# Altium PCB ATK_BC28_02.PcbDoc
Units mil, origin at the board's own origin, x right, y up, seen from the top; angles counter-clockwise.
Board outline 826 x 1653 mil, 2 copper layers (Top Layer, Bottom Layer); 36 components, 30 nets, 140 pads, 99 vias.
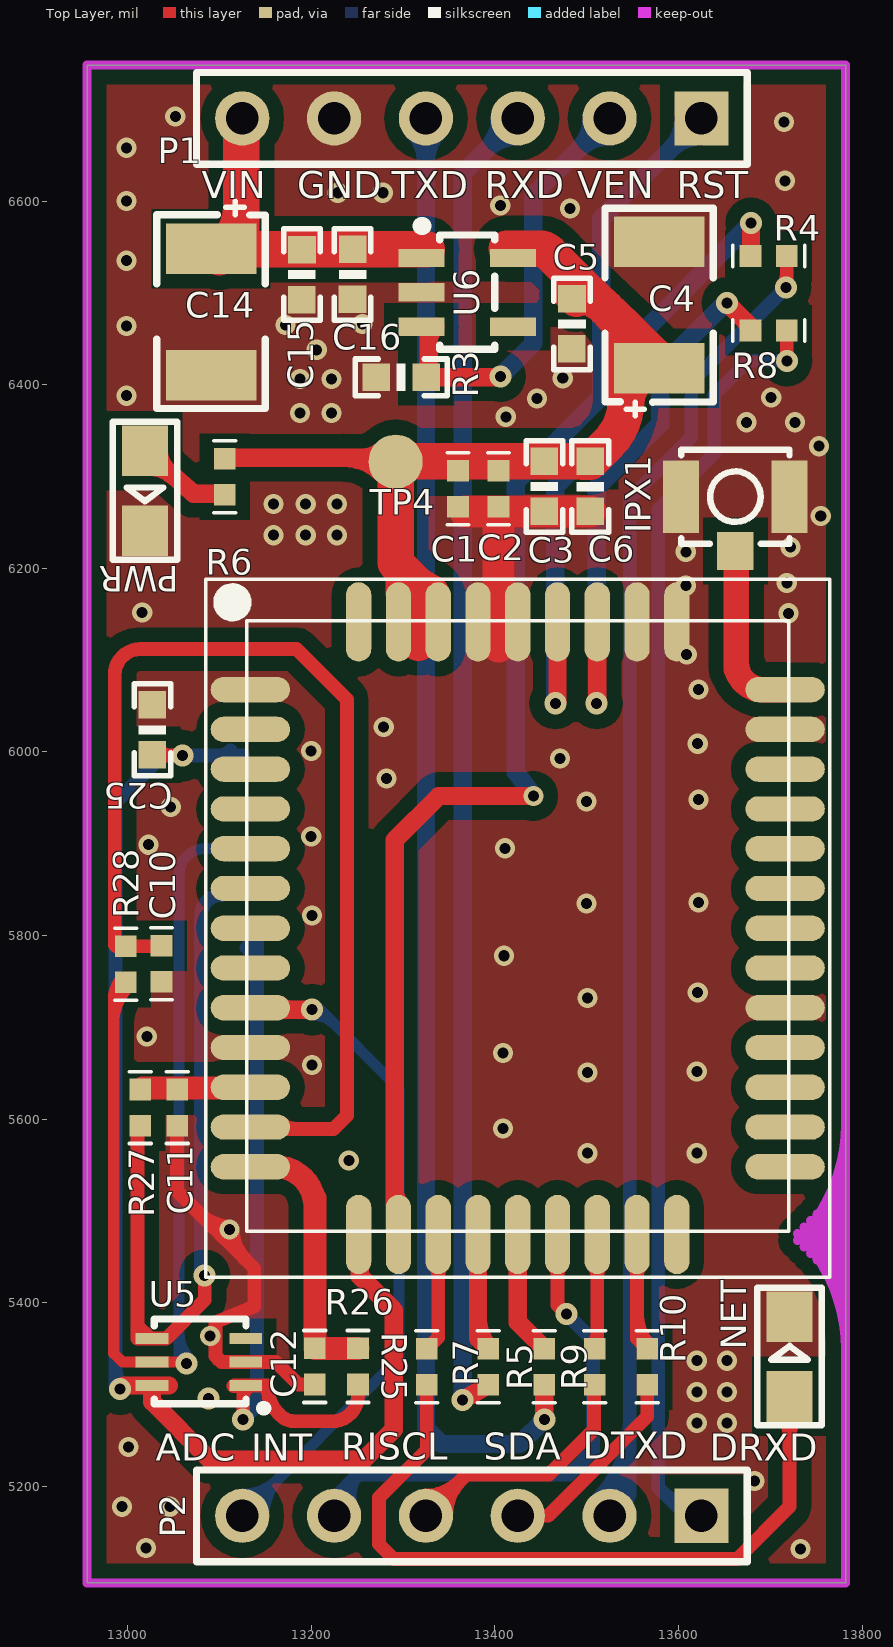
[diagram p0: Top Layer view]
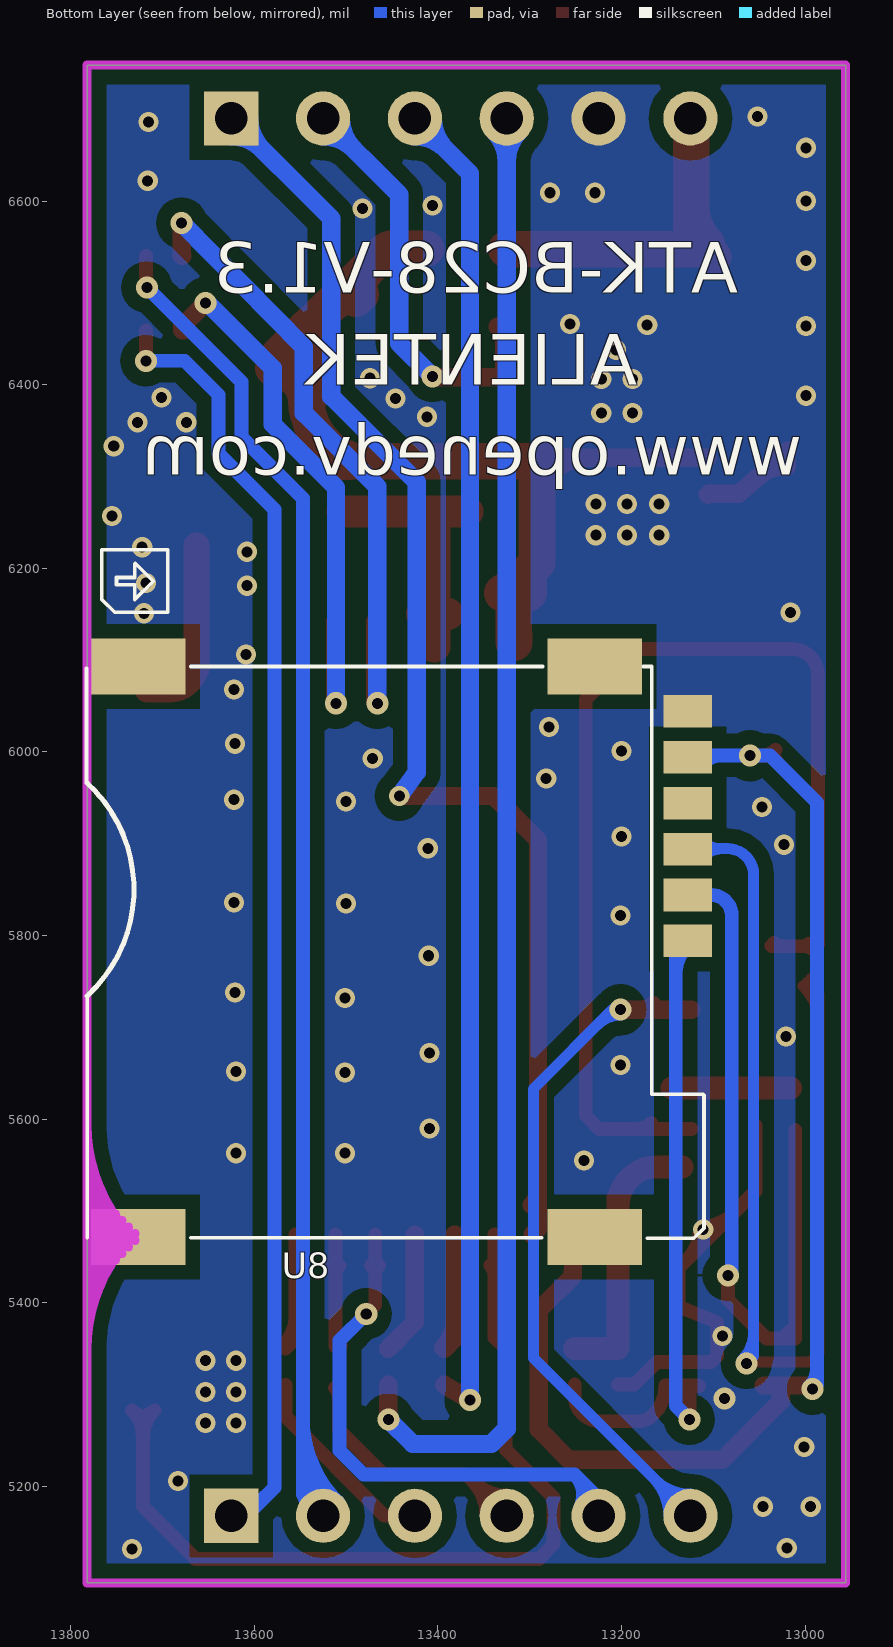
[diagram p1: Bottom Layer view, seen from below]

## Layer stack, top to bottom
Top Layer: signal copper 1.4
Dielectric: dielectric 12.6, FR-4, Dk 4.8
Bottom Layer: signal copper 1.4

## Board outline
12956,6748 13782,6748 13782,5095 12956,5095

## Design rules (kind name [scope] priority, off if disabled: settings)
Clearance [All] p1: gap=8
Clearance Clearance_Polygon [All] p2: gap=15
Clearance Clearance_Track [All] p3: gap=15
ComponentClearance [All] p1: gap=0 collisioncheckmode=3 verticalgap=0 showdistances=FALSE
FabricationTestPointUsage TestPointUsage [All] p1: valid=0 allowmultiple=FALSE
FabricationTestpoint Testpoint [(IsPad And (OnTopLayer Or OnBottomLayer))] p1: side=3 testpointundercomponent=TRUE minsize=40 maxsize=100 preferedsize=60 minholesize=0 maxholesize=40 preferedholesize=32 testpointgrid=1 allowsidetop=TRUE allowsidebottom=TRUE usegrid=TRUE gridtolerance=0.01
Height [All] p1: minheight=0 maxheight=2000 prefheight=500
HoleSize [All] p1: absolutevalues=TRUE maxlimit=100 minlimit=6 maxpercent=80.000 minpercent=20.000
HoleToHoleClearance [All] p1: gap=8 allowstackedmicrovias=TRUE
MinimumSolderMaskSliver [All] p1: minsoldermaskwidth=0
PlaneConnect [All] p1: planeconnectstyle=Direct reliefexpansion=20 reliefentries=4 reliefconductorwidth=10 reliefairgap=10
PolygonConnect [All] p1: connectstyle=Direct reliefconductorwidth=10 reliefentries=4 polygonreliefangle="90 Angle"
RoomDefinition ATK_BC28_01 [InComponentClass('ATK_BC28_01')] p1: confinementstyle=ConfineOut formatcopy=TRUE lockcomponents=FALSE outline 14538,4464 15002,4464 15002,4716 14538,4716
RoutingVias [All] p1: holewidth=22 width=22 viastyle="Through Hole" minholewidth=8 minwidth=18 maxholewidth=50 maxwidth=100
SilkToSilkClearance [All] p1: silktosilkclearance=0
SilkscreenOverComponentPads [All] p1: minsilkscreentomaskgap=0
SolderMaskExpansion [All] p1: expansion=6
Width PWR_IN [InNet('PWR_IN')] p1: maxlimit=40.94 minlimit=29.53 preferedwidth=39.37 minimp=50.000000 maximp=50.000000 favimp=50.000000
Width GND [InNet('GND')] p2: maxlimit=40 minlimit=10 preferedwidth=25 minimp=50.000000 maximp=50.000000 favimp=50.000000
Width VCC_IN [InNet('VCC_IN')] p3: maxlimit=45 minlimit=20 preferedwidth=40 minimp=50.000000 maximp=50.000000 favimp=50.000000
Width VCC_BAT [InNet('VCC_BAT')] p4: maxlimit=45 minlimit=20 preferedwidth=40 minimp=50.000000 maximp=50.000000 favimp=50.000000
Width [All] p5: maxlimit=45 minlimit=10 preferedwidth=15 minimp=50.000000 maximp=50.000000 favimp=50.000000
18 further rules are at their usual default settings.

## Components (designator, comment, footprint, x,y, rotation, side; value= is the part's Value field where it differs from the comment)
C1 "22pF" 0402 13360,6267 r90 top
C2 "100pF" 0402 13404,6267 r90 top
C3 "104" 0603P 13454,6289 r90 top
C4 "100uF" CAP3528 13579,6418 r90 top
C5 "104" 0603P 13484,6466 r90 top
C6 "1uF" 0603P 13504,6289 r90 top
C10 "22pF" 0402 13037,5789 r270 top
C11 "22pF" 0402 13054,5593 r90 top
C12 "22pF" 0402 13204,5311 r90 top
C14 "100uF" CAP3528 13091,6548 r270 top
C15 "10uF" 0603P 13190,6520 r270 top
C16 "0.1uF" 0603P 13245,6520 r90 top
C25 "104" 0603P 13027,6024 r90 top
IPX1 "IPEX" IPEX 13721,6278 r180 top
NET "LED" SMDLED 13721,5298 r90 top
P1 "Header 6" HDR1X6 13625,6690 r180 top
P2 "Header 6" HDR1X6 13625,5168 r180 top
PWR "LED" SMDLED 13019,6328 r270 top
R3 "100K" 0603P 13298,6408 r0 top
R4 "1K" 0402 13678.5,6540.06 r0 top
R5 "1K" 0402 13454,5350 r270 top
R6 "1K" 0402 13106,6280 r90 top
R7 "1K" 0402 13393,5350 r270 top
R8 "1K" 0402 13678.5,6459.06 r0 top
R9 "1K" 0402 13509,5350 r270 top
R10 "1K" 0402 13566,5350 r270 top
R25 "1K" 0402 13326,5310.63 r90 top
R26 "22R" 0402 13251,5311 r90 top
R27 "22R" 0402 13014,5593 r90 top
R28 "22R" 0402 12998,5749 r90 top
TP4 "TEST POINT" TP-1.5 13292,6316.13 r90 top
U5 "SMF05C" SMF05C 13129,5310 r180 top
U6 "RT9013" SOT-23-5 13320,6538 r0 top
U8 "Micro SIM" "Micro SIM" 13229,6093 r270 bottom
U? "RT9013" SOT-23-5 49999.5,49999.5 r0 top
? "BC28" MG2260 13425,5808 r0 top

## Footprints (in the part's own frame and the unit in brackets; to place one, negate y for a bottom-side part, rotate by r counter-clockwise, add the part's x,y. Pads: shape width x height; smd on the part's side, far side on the other; paste and mask are expansions set on the pad)
0402 [mm]
  rect 0.6x0.6 smd: 1(0,0) 2(1,0)
  silkscreen extent -0.5,-0.3 1.5,0.3
0603P [mil]
  rect 30x30 smd: 1(-27,0) 2(27.5,-0.06)
  silkscreen extent -50,-20 50,20
CAP3528 [mm] "1210 3.5MM*2.8MM"
  rect 1.398x2.5 smd: 1(0,0) 2(3.5,0)
  silkscreen extent -1.32,-1.5 4.42,1.5
HDR1X6 [mm] "Connector; Header; 6 Position"
  rect 1.5x1.5 hole 0.9: 1(0,0)
  round 1.5 hole 0.9: 2(2.54,0) 3(5.08,0) 4(7.62,0) 5(10.16,0) 6(12.7,0)
  silkscreen extent -1.27,-1.27 13.97,1.27
IPEX [mm] "IPEX座 2.6mm*2.6mm*1.25mm"
  rect 1x2 smd: 1(0,0) 3(3,0)
  rect 1x1.05 smd: 2(1.5,1.5)
  silkscreen extent 0,-1.3 3,1.3
MG2260 [mm]
  oval 2.195x0.7 smd: 1(-7.396,6.6) 2(-7.396,5.5) 3(-7.396,4.4) 4(-7.396,3.3) 5(-7.396,2.2) 6(-7.396,1.1) 7(-7.396,0) 8(-7.396,-1.1) 9(-7.396,-2.2) 10(-7.396,-3.3) 11(-7.396,-4.4) 12(-7.396,-5.5) 13(-7.396,-6.6) 23(7.396,-6.6) 24(7.396,-5.5) 25(7.396,-4.4) 26(7.396,-3.3) 27(7.396,-2.2) 28(7.396,-1.1) 29(7.396,0) 30(7.396,1.1) 31(7.396,2.2) 32(7.396,3.3) 33(7.396,4.4) 34(7.396,5.5) 35(7.396,6.6)
  oval 0.7x2.195 smd: 14(-4.4,-8.473) 15(-3.3,-8.473) 16(-2.2,-8.473) 17(-1.1,-8.473) 18(0,-8.473) 19(1.1,-8.473) 20(2.2,-8.473) 21(3.3,-8.473) 22(4.4,-8.473) 36(4.4,8.473) 37(3.3,8.473) 38(2.2,8.473) 39(1.1,8.473) 40(0,8.473) 41(-1.1,8.473) 42(-2.2,8.473) 43(-3.3,8.473) 44(-4.4,8.473)
  silkscreen extent -8.64,-9.65 8.64,9.65
"Micro SIM" [mm] "6P 自弹式"
  rect 0.9x1.34 smd: 1(1.24,2.565) 2(2.51,2.565) 3(3.78,2.565) 4(5.05,2.565) 5(6.32,2.565) 6(7.59,2.565)
  rect 1.56x2.61 smd: ""(0,-12.63) ""(0,0) ""(15.78,-12.63) ""(15.78,0)
  silkscreen extent -3.23,-14.06 15.82,3.02
SMDLED [mm]
  rect 1.4x1.27 smd: 1(0.001,-0.002) 2(2.211,-0.002)
  silkscreen extent -0.8,-0.89 3.01,0.89
SMF05C [mm] "SOT-363"
  rect 0.9x0.3 smd: 1(0,0) 2(0,-0.65) 3(0,-1.3) 4(2.6,-1.3) 5(2.6,-0.65) 6(2.6,0)
  silkscreen extent -0.51,-1.84 2.54,0.63
SOT-23-5 [mil]
  rect 50x20 smd: 1(0,0) 2(0,-37.4) 3(0,-74.8) 4(100,-74.8) 5(100,0)
  silkscreen extent 0,-99 80,35
TP-1.5 [mm] "1.5mm"
  round 1.5 smd: 1(0,0)

## Part data
C1 C2 C3 C5 C6 C10 C11 C12 C15 C16 C25: library part C
C4 C14: library part CAP
IPX1: "IPEX座"
P1 P2: "Header, 6-Pin"
R3 R4 R5 R6 R7 R8 R9 R10 R25 R26 R27 R28: library part R
TP4: library part TEST-POINT, "测试点"
U5: "TVS"
?: library part MG2260

## Via types
v1: diameter 22, hole 12, Top Layer to Bottom Layer, 82 vias
v2: diameter 24, hole 12, Top Layer to Bottom Layer, 17 vias

## Nets (pads, with @x,y where several pads share a name; then routed paths per layer and width w, separated by ;. In a path a pad name is that pad's centre, name@x,y a point inside that pad or via, vN(x,y) a via of type N, cw(c..) or ccw(c..) an arc to the next point about the centre after c; other vN are vias at no path point)
ADC: ?.9 P2.6 | length 1050.5
  Top Layer w20: ?.9@13123.82,5719.39 13135.82,5719.39 v2(13201,5719.39) ; ?.9@13165.92,5724.06 ccw(c13177.2,5735.34) 13177.2,5719.39 cw(c13177.2,5735.34) ?.9@13165.92,5724.06
  Bottom Layer w12: P2.6@13124,5168 13295.88,5339.88 13295.88,5633.12 13209.61,5719.39 v2(13201,5719.39) ; P2.6@13125,5191.53 ccw(c13125,5245.91) 13163.46,5207.46 cw(c13125,5245.91) P2.6@13125,5191.53 ; P2.6@13136.53,5168 cw(c13166.77,5168) 13145.39,5189.39 ccw(c13166.77,5168) P2.6@13136.53,5168 ; P2.6@13148.53,5168 cw(c13207.74,5168) 13165.87,5209.87 ccw(c13207.74,5168) P2.6@13148.53,5168 ; v2@13201,5713.39 cw(c13201,5678.1) 13225.95,5703.05 ccw(c13201,5678.1) v2@13201,5713.39
DRXD: P2.1 R8.2 | length 1462.6
  Top Layer w15: R8.2 13718,6458.93 v2(13718,6426)
  Bottom Layer w15: P2.1@13624,5168 13609,5168 13578,5199 13578,6264 13639,6325 13639,6389 13676,6426 v2(13718,6426) ; 13586,5191 ccw(c13602.59,5207.59) 13614.15,5187.17 cw(c13602.59,5207.59) 13586,5191
DTXD: P2.2 R4.2 | length 1908
  Top Layer w15: v2(13717,6506) 13717.87,6506.87 R4.2 ; v2@13713.82,6509.18 ccw(c13704.04,6518.96) 13717.87,6518.96 cw(c13704.04,6518.96) v2@13713.82,6509.18
  Bottom Layer w15: P2.2@13524,5168 13547,5191 13547,6276 13613.99,6342.99 13613.99,6402.99 v2(13717,6506) ; P2.2@13509.42,5183.58 ccw(c13418.71,5274.29) 13547,5274.29 cw(c13418.71,5274.29) P2.2@13509.42,5183.58 ; P2.2@13520.03,5172.97 ccw(c13454.92,5238.08) 13547,5238.08 cw(c13454.92,5238.08) P2.2@13520.03,5172.97 ; P2.2@13530.64,5162.36 ccw(c13491.13,5201.87) 13547,5201.87 cw(c13491.13,5201.87) P2.2@13530.64,5162.36
GND: ?.1 ?.10 ?.27 ?.34 ?.36 ?.37 ?.40 ?.41 C1.1 C2.1 C3.1 C4.2 C5.1 C6.1 C10.2 C11.1 C12.1 C14.2 C15.2 C16.1 C25.2 IPX1.1 IPX1.3 NET.2 P1.5 PWR.2 R3.1 U5.2 U6.2 U8.1 | length 1037
  Top Layer w15: C11.1 13054,5521.63 13138,5437.63 13138,5396 13095.78,5378.89 13095.78,5342.22 13102.41,5335.59 U5.2 13161.41,5335.59 13186,5311 C12.1 ; 13078.79,5496.84 ccw(c13111,5529.06) 13111,5483.5 cw(c13111,5529.06) 13078.79,5496.84 ; 13099.5,5480 ccw(c13108.84,5480) 13102.24,5473.39 cw(c13108.84,5480) 13099.5,5480 ; v1@13104.39,5471.24 ccw(c13111,5477.84) 13111,5468.5 cw(c13111,5477.84) v1@13104.39,5471.24 ; v1@13114.5,5480 ccw(c13160.06,5480) 13127.84,5447.79 cw(c13160.06,5480) v1@13114.5,5480
  Top Layer w35: C1.1@13368,6262 C3.1 ; 13404,6115 13404,6262 C3.1 ; C6.1 C3.1 ; ?.41@13388.98,6150.18 cw(c13385.5,6132.01) 13404,6132.01 ccw(c13385.5,6132.01) ?.41@13388.98,6150.18 ; 13404,6133.88 cw(c13420.53,6133.88) 13417.2,6150.08 ccw(c13420.53,6133.88) 13404,6133.88
  other v1: 13733,5132 13020,5133 12994,5178 13046,5178 13683,5206 13001,5243 13620,5269 13653,5269 13620,5303 13653,5303 13620,5337 13653,5337 13090,5364 13111,5480 13241,5555 13501,5563 13620,5563 13409,5590 13501,5651 13620,5652 13201,5659 13409,5672 13021,5690 13501,5732 13621,5738 13410,5778 13201,5822 13500,5835 13622,5836 13411,5895 13023,5899 13200,5908 13047,5940 13500,5946 13622,5948 13282,5971 13471,5993 13200,6001 13621,6009 13279,6027 13622,6068 13609,6106 13720,6151 13016,6152 13608,6181 13718,6184 13608,6218 13722,6223 13159,6236 13194,6236 13228,6236 13755,6257 13159,6270 13194,6270 13228,6270 13753,6333 13674,6359 13727,6359 13412,6365 13188,6369 13222,6369 13446,6385 13701,6386 12999,6388 13188,6406 13222,6406 13474,6407 13206,6438 12999,6464 13172,6465 13256,6466 12999,6535 13482,6592 13406,6595 12999,6600 13229,6609 13278,6609 13716,6622 12999,6658 13715,6686 13052,6692
  other v2: 13088,5296
NETLIGHT: ?.16 R25.2 | length 177.2
  Top Layer w15: R25.2 13338.39,5362.39 ?.16 ; 13338.39,5429.82 cw(c13353.55,5429.82) 13342.83,5440.54 ccw(c13353.55,5429.82) 13338.39,5429.82 ; 13338.39,5429.82 ccw(c13323.23,5429.82) 13333.95,5440.54 cw(c13323.23,5429.82) 13338.39,5429.82
NetNET_1: NET.1 R25.1 | length 948.7
  Top Layer w15: R25.1 13326,5240 13274,5188 13274,5137 13290,5121 13664,5121 13721.06,5178.06 13721.06,5269.03 ; 13721.06,5253.22 cw(c13763.31,5253.22) 13733.44,5283.1 ccw(c13763.31,5253.22) 13721.06,5253.22 ; 13721.06,5253.22 ccw(c13678.82,5253.22) 13708.69,5283.1 cw(c13678.82,5253.22) 13721.06,5253.22 ; 13721.06,5269.03 cw(c13732.29,5269.03) 13727.9,5279.36 ccw(c13732.29,5269.03) 13721.06,5269.03 ; 13721.06,5269.03 ccw(c13709.84,5269.03) 13714.23,5279.36 cw(c13709.84,5269.03) 13721.06,5269.03
NetPWR_1: PWR.1 R6.1 | length 425.2
  Top Layer w20: PWR.1 13045.24,6304.8 13070,6283 13072,6281 13105,6281 R6.1 ; PWR.1@13019.94,6311.06 PWR.1@13019.94,6316.97 ; PWR.1@13021.58,6310.64 cw(c13026.84,6281.34) 13046.51,6303.68 ; PWR.1@13021.58,6310.64 cw(c13026.84,6281.34) 13046.51,6303.68 ; PWR.1@13021.58,6310.64 cw(c13026.84,6281.34) 13046.51,6303.68 ; PWR.1@13021.58,6310.64 cw(c13026.84,6281.34) 13046.51,6303.68 ; PWR.1@13033.91,6326.36 ccw(c13063.5,6328.24) PWR.1@13043.9,6305.98 ; PWR.1@13033.91,6326.36 ccw(c13063.5,6328.24) PWR.1@13043.9,6305.98 ; PWR.1@13033.91,6326.36 ccw(c13063.5,6328.24) PWR.1@13043.9,6305.98 ; PWR.1@13033.91,6326.36 ccw(c13063.5,6328.24) PWR.1@13043.9,6305.98 ; PWR.1@13033.91,6326.36 ccw(c13063.5,6328.24) PWR.1@13043.9,6305.98 ; PWR.1@13033.91,6326.36 ccw(c13063.5,6328.24) PWR.1@13043.9,6305.98 ; PWR.1@13019.89,6310.44 cw(c13022.6,6267.75) 13050.86,6299.85 ccw(c13022.6,6267.75) PWR.1@13019.89,6310.44
NetR27_1: R27.1 U5.4 U8.5 | length 794.4
  Top Layer w15: R27.1@13010.82,5588.18 13010.82,5375 ; v2(13084,5430) 13084,5402.93 13042.25,5361.18 U5.4 ; 13010.82,5375 13023.22,5362.6 ccw(c13026.64,5366.01) U5.4 ; 13010.82,5375 13010.82,5361.18 U5.4
  Bottom Layer w15: v2(13084,5430) 13080,5434 13080,5822 cw(c13102.18,5822) U8.5@13102.18,5844.18
NetR28_1: R28.1 U5.5 U8.4 | length 1454.6
  Top Layer w12: R28.1 12985,5736 12985,5345 12994.41,5335.59 U5.5 v2@13062.41,5335.59 ; R28.1@12988.08,5739.08 cw(c12998,5729.16) 12998,5743.19 ccw(c12998,5729.16) R28.1@12988.08,5739.08 ; R28.1@12988.08,5739.08 ccw(c12978.16,5749) 12992.19,5749 cw(c12978.16,5749) R28.1@12988.08,5739.08 ; 12985,5703.59 cw(c13043.41,5703.59) 13002.11,5744.89 ccw(c13043.41,5703.59) 12985,5703.59 ; 12985,5732.56 cw(c13014.44,5732.56) 12993.62,5753.38 ccw(c13014.44,5732.56) 12985,5732.56
  Bottom Layer w12: v2(13064,5334) 13056,5342 13056,5866 cw(c13084.69,5866) 13084.69,5894.69 13127.49,5894.69 U8.4 ; 13056,5367.8 ccw(c13097.8,5367.8) 13068.24,5338.24 cw(c13097.8,5367.8) 13056,5367.8 ; 13089.82,5894.69 cw(c13089.82,5864.67) 13111.05,5885.9 ccw(c13089.82,5864.67) 13089.82,5894.69 ; 13092.28,5894.69 ccw(c13092.28,5921.24) 13111.05,5902.47 cw(c13092.28,5921.24) 13092.28,5894.69
  Bottom Layer w15: U8.4@13125.82,5892 ccw(c13125.82,5894.18) U8.4
PSM_EINT: ?.19 P2.5 | length 757.3
  Top Layer w15: ?.19 13468.31,5397.69 v2(13478,5388) ; 13468.31,5429.82 cw(c13483.47,5429.82) 13472.75,5440.54 ccw(c13483.47,5429.82) 13468.31,5429.82 ; 13468.31,5429.82 ccw(c13453.15,5429.82) 13463.87,5440.54 cw(c13453.15,5429.82) 13468.31,5429.82
  Bottom Layer w15: P2.5@13224,5168 13224,5186 13251.03,5213.03 ; v2(13478,5388) 13507,5359 13507,5239 13481.03,5213.03 13251.03,5213.03 ; 13251.03,5213.03 ccw(c13273.15,5190.9) 13244.89,5177.46 cw(c13273.15,5190.9) 13251.03,5213.03 ; P2.5@13231.35,5171.02 cw(c13252.79,5181.21) 13236,5198 ccw(c13252.79,5181.21) P2.5@13231.35,5171.02
RF_AN: ?.35 IPX1.2 | length 204.8
  Top Layer w28: 13662.94,6090.06 IPX1.2@13662.94,6224.94 ; 13662.94,6097.06 ccw(c13663,6097.06) 13663,6097 ccw(c13692.16,6097) 13692.16,6067.84 ?.35
RI: P2.4 R9.2 | length 460.8
  Top Layer w15: P2.4@13324,5168 13369.03,5213.03 13459.03,5213.03 13508,5262 13508,5309.63 R9.2 ; P2.4@13325,5190.03 ccw(c13325,5240.79) 13360.9,5204.9 cw(c13325,5240.79) P2.4@13325,5190.03 ; P2.4@13347.03,5168 cw(c13402.62,5168) 13363.31,5207.31 ccw(c13402.62,5168) P2.4@13347.03,5168 ; 13508,5297.81 cw(c13521.82,5297.81) 13512.05,5307.58 ccw(c13521.82,5297.81) 13508,5297.81
RI_SCL: ?.20 R9.1 | length 203.5
  Top Layer w15: R9.1 13511.61,5352.61 ?.20 ; 13511.61,5429.82 cw(c13526.77,5429.82) 13516.05,5440.54 ccw(c13526.77,5429.82) 13511.61,5429.82 ; 13511.61,5429.82 ccw(c13496.45,5429.82) 13507.17,5440.54 cw(c13496.45,5429.82) 13511.61,5429.82 ; R9.1@13505.95,5353.05 ccw(c13492.28,5366.72) 13511.61,5366.72 cw(c13492.28,5366.72) R9.1@13505.95,5353.05
RI_SDA: ?.21 R10.1 | length 252.4
  Top Layer w15: ?.21 13554.92,5361.08 R10.1 ; 13554.92,5429.82 cw(c13570.08,5429.82) 13559.36,5440.54 ccw(c13570.08,5429.82) 13554.92,5429.82 ; 13554.92,5429.82 ccw(c13539.76,5429.82) 13550.48,5440.54 cw(c13539.76,5429.82) 13554.92,5429.82 ; 13554.92,5387.15 ccw(c13603.15,5387.15) 13569.05,5353.05 cw(c13603.15,5387.15) 13554.92,5387.15
RST: ?.15 P1.1 | length 1615.2
  Top Layer w20: ?.15@13297,5474.34 13291,5480.34 13291,5903.92 13339.08,5952 v1(13442,5952) ; 13291,5522.82 ccw(c13314.05,5522.82) 13297.75,5506.52 cw(c13314.05,5522.82) 13291,5522.82
  Bottom Layer w20: v1(13442,5952) 13423,5978 13423,6294 13516,6387 13516,6581 P1.1 ; 13591.66,6656.66 cw(c13625,6623.33) 13625,6670.47 ccw(c13625,6623.33) 13591.66,6656.66 ; 13591.66,6656.66 ccw(c13558.33,6690) 13605.47,6690 cw(c13558.33,6690) 13591.66,6656.66
RXD: P1.3 R7.2 | length 1601.5
  Top Layer w20: v2(13365,5294) R7.2
  Bottom Layer w20: v2(13365,5294) 13365,6630 P1.3 ; 13391.66,6656.66 cw(c13425,6623.33) 13425,6670.47 ccw(c13425,6623.33) 13391.66,6656.66 ; 13391.66,6656.66 ccw(c13358.33,6690) 13405.47,6690 cw(c13358.33,6690) 13391.66,6656.66
SDA: P2.3 R10.2 | length 221.4
  Top Layer w15: P2.3@13424,5168 13458,5168 13566,5276 R10.2
SIM_CLK: ?.13 C12.2 R26.2 | length 395.5
  Top Layer w25: ?.13@13158.42,5548.16 ?.13 ?.13@13161.15,5548.16 ; C12.2 R26.2 ; C12.2@13204,5352.37 13204,5505.31 ; 13204,5514.31 13204,5505.31 ; ?.13@13161.15,5548.16 cw(c13161.15,5505.31) 13204,5505.31 ; ?.13@13161.15,5548.16 cw(c13161.15,5505.31) 13204,5505.31
SIM_CLKP: R26.1 U5.1 U8.6 | length 851
  Top Layer w15: v2(13126,5273) 13126,5296 13126,5298 ; U5.1@13129,5306 13126,5306 13126,5298 ; U5.1@13129,5309.48 13115.5,5309.48 cw(c13116.75,5308.24) 13116.75,5310 U5.1 ; U5.1@13131.41,5309 cw(c13131.41,5312.41) U5.1 ; 13152,5307 13152,5310 ; R26.1 13251,5299 cw(c13223,5299) 13223,5271 13182,5271 cw(c13182,5293.14) 13166.34,5277.49 13164.85,5278.98 cw(c13195.87,5310) 13152,5310 ; 13126,5298 cw(c13138,5298) U5.1@13138,5310 ; U5.1 U5.1@13138,5310 ; U5.1@13138,5310 13152,5310
  Bottom Layer w15: v2(13126,5273) 13141,5288 U8.6@13141,5794.18 ; U8.6@13129.44,5786.96 cw(c13101.52,5759.04) 13141,5759.04 ccw(c13101.52,5759.04) U8.6@13129.44,5786.96
SIM_DATA: ?.11 C11.2 R27.2 | length 128.8
  Top Layer w25: R27.2@13016.04,5633.77 ?.11@13144.82,5633.77
SIM_RST: ?.12 C10.1 R28.2 | length 1445.4
  Top Layer w15: C10.1 13036.37,5788.37 13021,5788.37 ; ?.12@13123.82,5589.46 13224.46,5589.46 13239,5604 13239,6057 13184,6112 13014,6112 ; 12986,5791 cw(c12986,5781.47) 12994.26,5786.22 ccw(c12986,5781.47) 12986,5791 ; 12986,5791 ccw(c12988.63,5791) 12988.63,5788.37 13021,5788.37 ; 12986,5791 12995.37,5791 cw(c12995.37,5788.37) R28.2 13021,5788.37 ; 12986,5791 12986,6084 ; 12986,6084 cw(c13014,6084) 13014,6112 ; 12986,6084 cw(c13014,6084) 13014,6112 ; 13025.07,5788.37 ccw(c13025.07,5800.93) C10.1@13033.95,5792.05 ; 13025.07,5788.37 ccw(c13025.07,5800.93) C10.1@13033.95,5792.05 ; 13025.07,5788.37 ccw(c13025.07,5800.93) C10.1@13033.95,5792.05 ; 13025.07,5788.37 ccw(c13025.07,5800.93) C10.1@13033.95,5792.05 ; 13025.07,5788.37 ccw(c13025.07,5800.93) C10.1@13033.95,5792.05 ; 13025.07,5788.37 ccw(c13025.07,5800.93) C10.1@13033.95,5792.05 ; 13025.07,5788.37 ccw(c13025.07,5800.93) C10.1@13033.95,5792.05 ; 13025.07,5788.37 ccw(c13025.07,5800.93) C10.1@13033.95,5792.05 ; 13025.07,5788.37 ccw(c13025.07,5800.93) C10.1@13033.95,5792.05 ; 13025.07,5788.37 ccw(c13025.07,5800.93) C10.1@13033.95,5792.05 ; ?.12@13167.69,5595.9 ccw(c13183.24,5611.45) 13183.24,5589.46 cw(c13183.24,5611.45) ?.12@13167.69,5595.9
SIM_VDD: ?.14 C25.1 U5.6 U8.2 | length 1635.4
  Top Layer w15: v2(13060,5996) 13044.52,5996 ; C25.1@13032.3,5991.7 cw(c13042.69,5981.31) 13042.69,5996 ; C25.1@13032.3,5991.7 cw(c13042.69,5981.31) 13042.69,5996 ; C25.1@13032.3,5991.7 cw(c13042.69,5981.31) 13042.69,5996 ; C25.1@13032.3,5991.7 cw(c13042.69,5981.31) 13042.69,5996 ; 13044.52,5996 cw(c13044.52,6010.81) 13032.89,6001.64 ccw(c13044.52,6010.81) 13044.52,5996 ; C25.1@13032.3,6002.3 ccw(c13047.52,6017.52) 13047.52,5996 cw(c13047.52,6017.52) C25.1@13032.3,6002.3
  Top Layer w20: v2@12996,5310 U5.6 ; 13045,5310 U5.6 ; ?.14 13253,5429 13289.99,5392.01 13289.99,5261.99 13257,5229 13090,5229 13026.64,5292.36 U5.6
  Bottom Layer w15: v2@12987,5311 12987,5945 13038.18,5996.18 U8.2@13126,5996.18 ; 12987,5328.94 ccw(c13014.93,5328.94) 12995.18,5309.18 cw(c13014.93,5328.94) 12987,5328.94 ; 13089.85,5996.18 cw(c13089.85,5964.69) 13112.11,5986.96 ccw(c13089.85,5964.69) 13089.85,5996.18 ; 13099.5,5996.18 ccw(c13099.5,6014.02) 13112.11,6001.41 cw(c13099.5,6014.02) 13099.5,5996.18
  other v2: 12992,5306
TXD: P1.4 R5.2 | length 1759.8
  Top Layer w20: v2(13454,5273) R5.2
  Bottom Layer w20: P1.4 13325,5263 13341.8,5246.2 13427.2,5246.2 v2(13454,5273) ; 13325,6642.86 cw(c13372.14,6642.86) 13338.81,6676.19 ccw(c13372.14,6642.86) 13325,6642.86 ; 13325,6642.86 ccw(c13277.86,6642.86) 13311.19,6676.19 cw(c13277.86,6642.86) 13325,6642.86
UART1_RXD: ?.17 R7.1 | length 196.6
  Top Layer w20: ?.17 13381.69,5361.31 R7.1 ; 13381.69,5381.67 ccw(c13424.67,5381.67) 13394.28,5351.28 cw(c13424.67,5381.67) 13381.69,5381.67
UART1_TXD: ?.18 R5.1 | length 136.4
  Top Layer w20: ?.18 13425,5379 R5.1
UART2_RXD: ?.38 R8.1 | length 649
  Top Layer w20: v2(13511,6053) 13511.61,6053.61 ?.38 ; v2(13653,6489) 13678.5,6463.5 R8.1 ; R8.1@13672.27,6469.73 cw(c13661.61,6459.06) 13676.69,6459.06 ccw(c13661.61,6459.06) R8.1@13672.27,6469.73
  Bottom Layer w20: v2(13511,6053) 13511,6288 13580,6357 13580,6418 13651,6489 v2(13653,6489)
UART2_TXD: ?.39 R4.1 | length 736.3
  Top Layer w20: v2(13466,6053) 13468.31,6055.31 ?.39 ; R4.1 13679,6540.56 v2(13679,6576)
  Bottom Layer w20: v2(13466,6053) 13466,6289 13546,6369 13546,6441 v2(13679,6576)
VCC_BAT: ?.42 ?.43 C1.2 C2.2 C3.2 C4.1 C5.2 C6.2 R6.2 TP4.1 U6.5 | length 1512.6
  Top Layer w20: R6.2@13106.06,6320.5 TP4.1@13287.63,6320.5 ; TP4.1@13302,6306.13 ccw(c13292,6306.13) TP4.1 ; TP4.1@13287.63,6320.5 cw(c13287.63,6316.13) TP4.1 ; TP4.1@13287.63,6320.5 TP4.1 ; 13234.31,6320.5 cw(c13234.31,6258.44) 13278.19,6302.32 ccw(c13234.31,6258.44) 13234.31,6320.5 ; 13255.41,6320.5 ccw(c13255.41,6352.72) 13278.19,6329.94 cw(c13255.41,6352.72) 13255.41,6320.5
  Top Layer w40: TP4.1 13292,6205.96 13317.62,6180.34 13317.23,6141.8 13317.23,6141.36 13317,6119 ; TP4.1@13292.37,6316.5 C3.2 C6.2@13496.43,6316.5 ; ?.43@13301,6173 13301,6189.61 ; 13317.95,6180.15 ?.42@13330,6173 ; 13413,6548 13449.34,6548 ; 13474.61,6528.39 cw(c13439.73,6493.5) C5.2@13489.06,6493.5 ; C5.2@13483.95,6498.5 cw(c13485.04,6449.19) 13519.14,6484.83 ; C6.2@13500.25,6320.31 C6.2@13496.43,6316.5 ; C6.2@13504.06,6316.13 13496.06,6316.13 C6.2@13496.43,6316.5 ; 13521.12,6482.93 cw(c13456.88,6415.78) C4.1@13549.79,6417.83 ; 13526.46,6477.82 cw(c13473.91,6422.89) C4.1@13549.8,6418.44 ; 13543,6380.19 cw(c13579.12,6380.19) C4.1@13561.08,6411.48 ; C4.1@13561.87,6424 cw(c13590.71,6462) 13543,6462 ; C4.1 ccw(c13559.69,6418) 13573.34,6431.66 13543,6462 ; 13449.34,6548 cw(c13449.34,6534.34) 13459,6544 ; 13449.34,6548 cw(c13449.34,6534.34) 13459,6544 ; 13459,6544 13496.78,6506.22 13543,6462 ; C6.2@13496.43,6316.5 C6.2 13523.51,6335.95 ccw(c13476.45,6383) 13543,6383 13543,6462
VEN: P1.2 R3.2 U6.3 | length 687.1
  Top Layer w20: R3.2@13328,6409.39 U6.3@13328,6462.2 ; v2(13406,6409) 13404.94,6407.94 R3.2 ; R3.2 cw(c13326.56,6407.94) R3.2@13326.56,6409 ; R3.2 cw(c13326.56,6407.94) R3.2@13326.56,6409 ; R3.2 cw(c13326.56,6407.94) R3.2@13326.56,6409 ; R3.2@13321.96,6411.47 ccw(c13307.39,6426.04) 13328,6426.04 cw(c13307.39,6426.04) R3.2@13321.96,6411.47 ; 13328,6446.3 cw(c13351.9,6446.3) 13335,6463.2 ccw(c13351.9,6446.3) 13328,6446.3
  Bottom Layer w20: v2(13406,6409) 13442,6445 13442,6607 P1.2 ; 13491.66,6656.66 cw(c13525,6623.33) 13525,6670.47 ccw(c13525,6623.33) 13491.66,6656.66 ; 13491.66,6656.66 ccw(c13458.33,6690) 13505.47,6690 cw(c13458.33,6690) 13491.66,6656.66
VIN: C14.1 C15.1 C16.2 P1.6 U6.1 | length 467.6
  Top Layer w40: C14.1@13100,6539 C14.1@13108.5,6547.5 ; P1.6 13124,6689 13124,6563 C14.1@13108.5,6547.5 ; U6.1@13325.5,6547.5 13239.06,6547.5 C14.1@13108.5,6547.5 ; C14.1@13107.36,6553.32 ccw(c13067.2,6593.49) 13124,6593.49 cw(c13067.2,6593.49) C14.1@13107.36,6553.32
pads on no net: ?.2 ?.3 ?.4 ?.5 ?.6 ?.7 ?.8 ?.22 ?.23 ?.24 ?.25 ?.26 ?.28 ?.29 ?.30 ?.31 ?.32 ?.33 ?.44 U5.3 U6.4 U8. U8.3 U?.1 U?.2 U?.3 U?.4 U?.5

## Polygon pours and split planes (outlines as drawn)
GND on Top Layer "Bottom Layer-No Net" (solid, remove dead copper): 12948,6749 13782,6749 13782,5095 13781,5096 12948,5096
GND on Bottom Layer "Bottom Layer-No Net" (solid, remove dead copper): 12948,6749 13782,6749 13782,5095 12949,5095

## Keep-outs
Keep-Out Layer:
  lines w10: 13782,5100 13782,6748 12956,6748 12956,5095 13782,5095 13782,5154 ; 13729.78,5468.2 ccw(c13603.71,5594.28) 13782,5594.28 cw(c13603.71,5594.28) 13729.78,5468.2 ; 13729.78,5475.28 cw(c13603.71,5349.2) 13782,5349.2 ccw(c13603.71,5349.2) 13729.78,5475.28 ; 13736.85,5461.13 ccw(c13627.85,5570.13) 13782,5570.13 cw(c13627.85,5570.13) 13736.85,5461.13 ; 13736.85,5482.35 cw(c13627.85,5373.35) 13782,5373.35 ccw(c13627.85,5373.35) 13736.85,5482.35 ; 13743.92,5454.06 ccw(c13651.99,5545.99) 13782,5545.99 cw(c13651.99,5545.99) 13743.92,5454.06 ; 13743.92,5489.42 cw(c13651.99,5397.49) 13782,5397.49 ccw(c13651.99,5397.49) 13743.92,5489.42 ; 13750.99,5446.99 ccw(c13676.13,5521.85) 13782,5521.85 cw(c13676.13,5521.85) 13750.99,5446.99 ; 13750.99,5496.49 cw(c13676.13,5421.63) 13782,5421.63 ccw(c13676.13,5421.63) 13750.99,5496.49 ; 13758.06,5439.92 ccw(c13700.28,5497.71) 13782,5497.71 cw(c13700.28,5497.71) 13758.06,5439.92 ; 13758.06,5503.56 cw(c13700.28,5445.77) 13782,5445.77 ccw(c13700.28,5445.77) 13758.06,5503.56

## Silkscreen, mask and mechanical layers (free items; w line width, h text height)
Top Overlay:
  text "VIN" at 13081,6603 h29.57
  text "GND" at 13185,6603 h29.57
  text "TXD" at 13288,6603 h29.57
  text "RXD" at 13389,6603 h29.57
  text "VEN" at 13490,6603 h29.57
  text "RST" at 13598,6603 h29.57
  text "DTXD" at 13496,5230 h29.57
  text "RISCL" at 13233,5229 h29.57
  text "SDA" at 13388,5229 h29.57
  text "ADC" at 13031,5228 h29.57
  text "INT" at 13135,5228 h29.57
  text "DRXD" at 13634,5228 h29.57
Bottom Overlay:
  text "ATK-BC28-V1.3" at 13073,6500 h55
  text "ALIENTEK" at 13183,6400 h55
  text "www.openedv.com" at 13003,6302 h55

## Dimensions
13782,5100 to 12956,5095 on Top Overlay
12956,5095 to 12956,6748 on Top Overlay